# Altium PCB Рожкова.pcbdoc
Units mm, origin at the board's own origin, x right, y up, seen from the top; angles counter-clockwise.
Board outline 45 x 47.5 mm, 2 copper layers (Top Layer, Bottom Layer); 29 components, 20 nets, 108 pads, 19 vias.
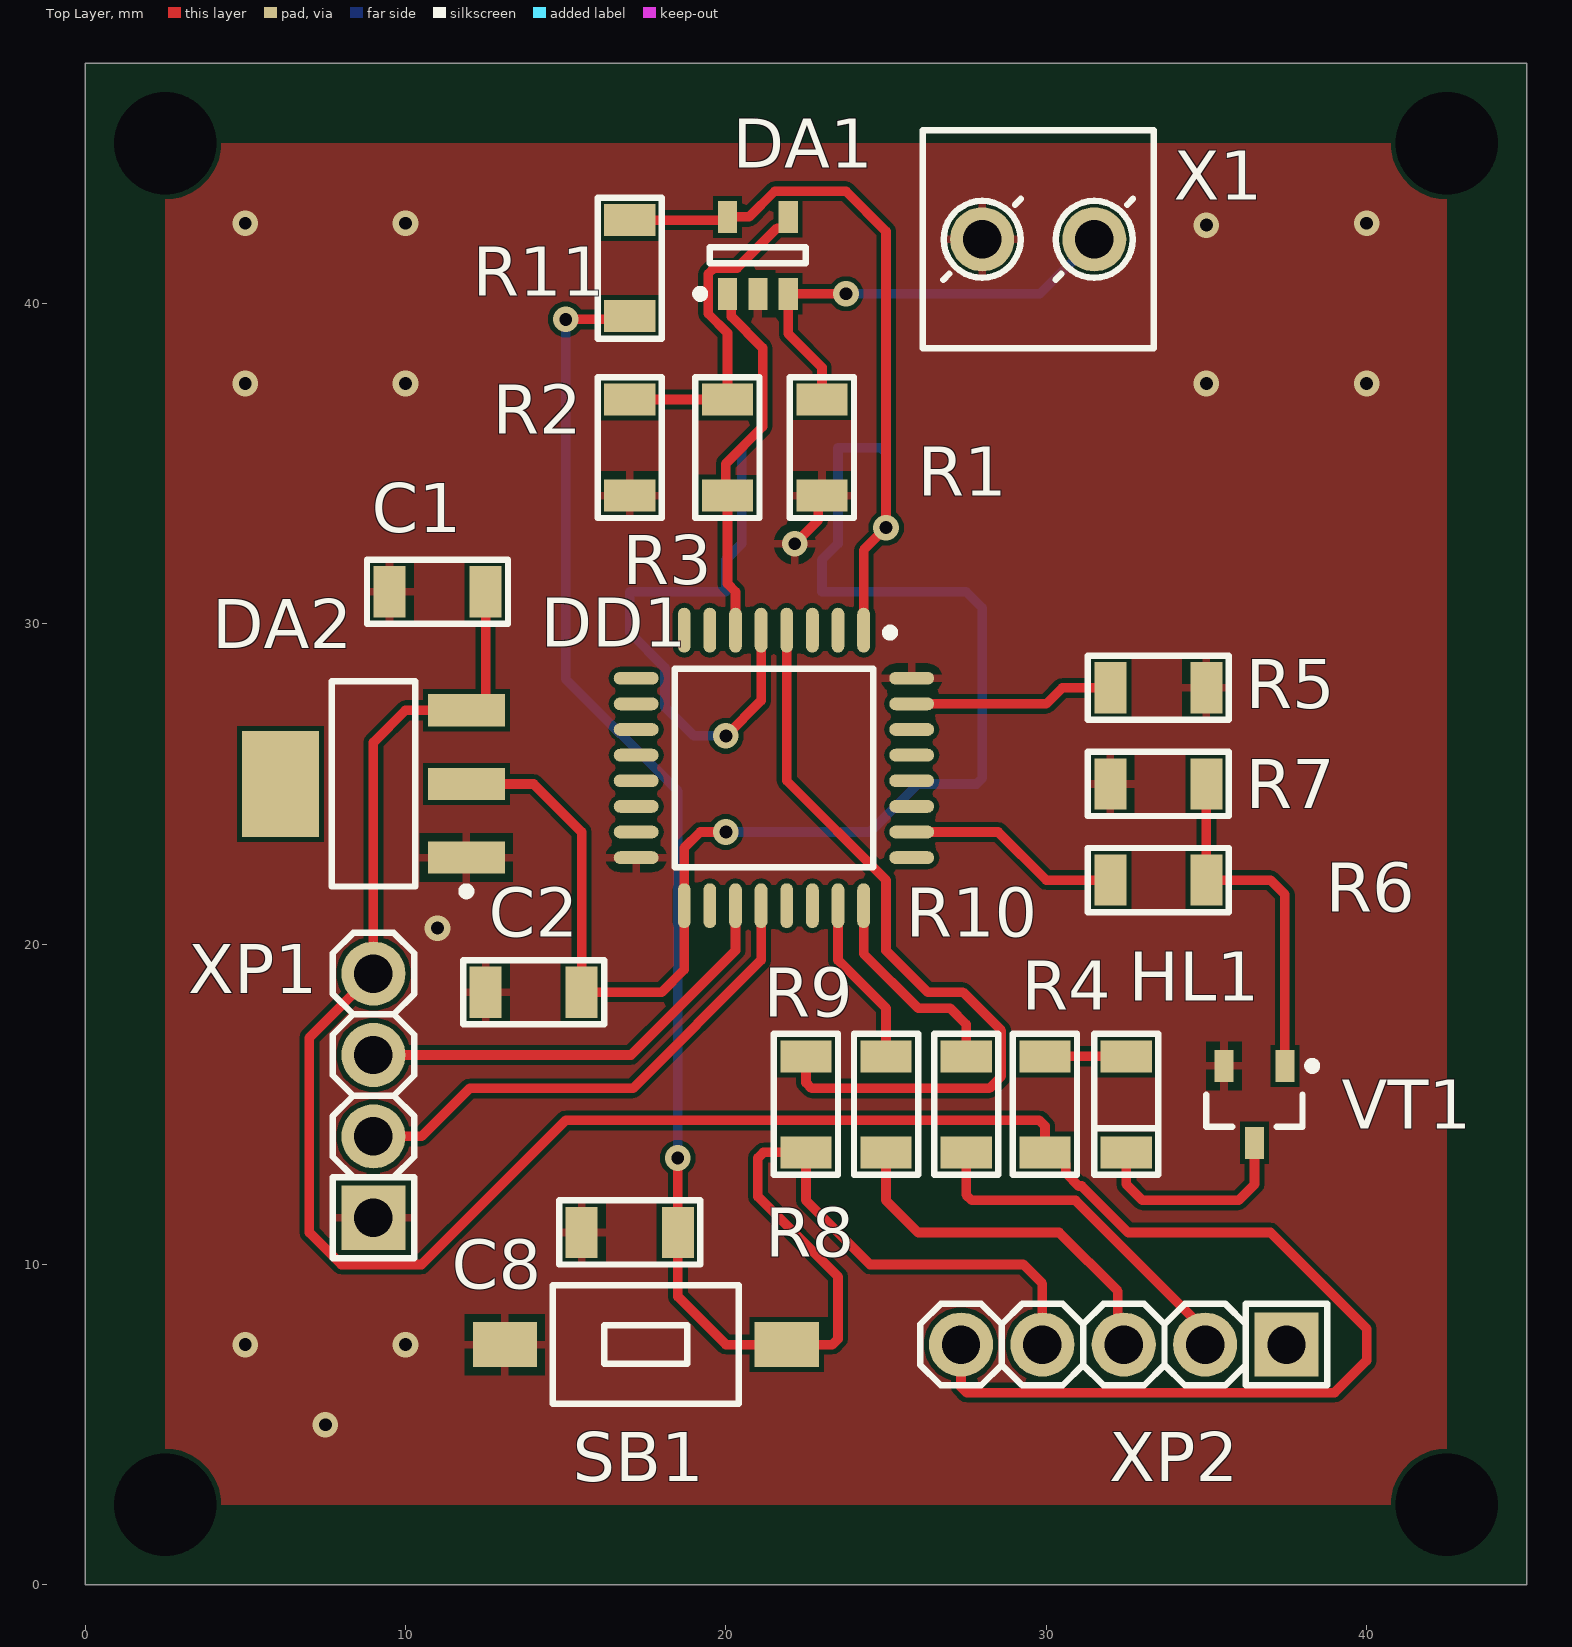
[diagram p0: Top Layer view]
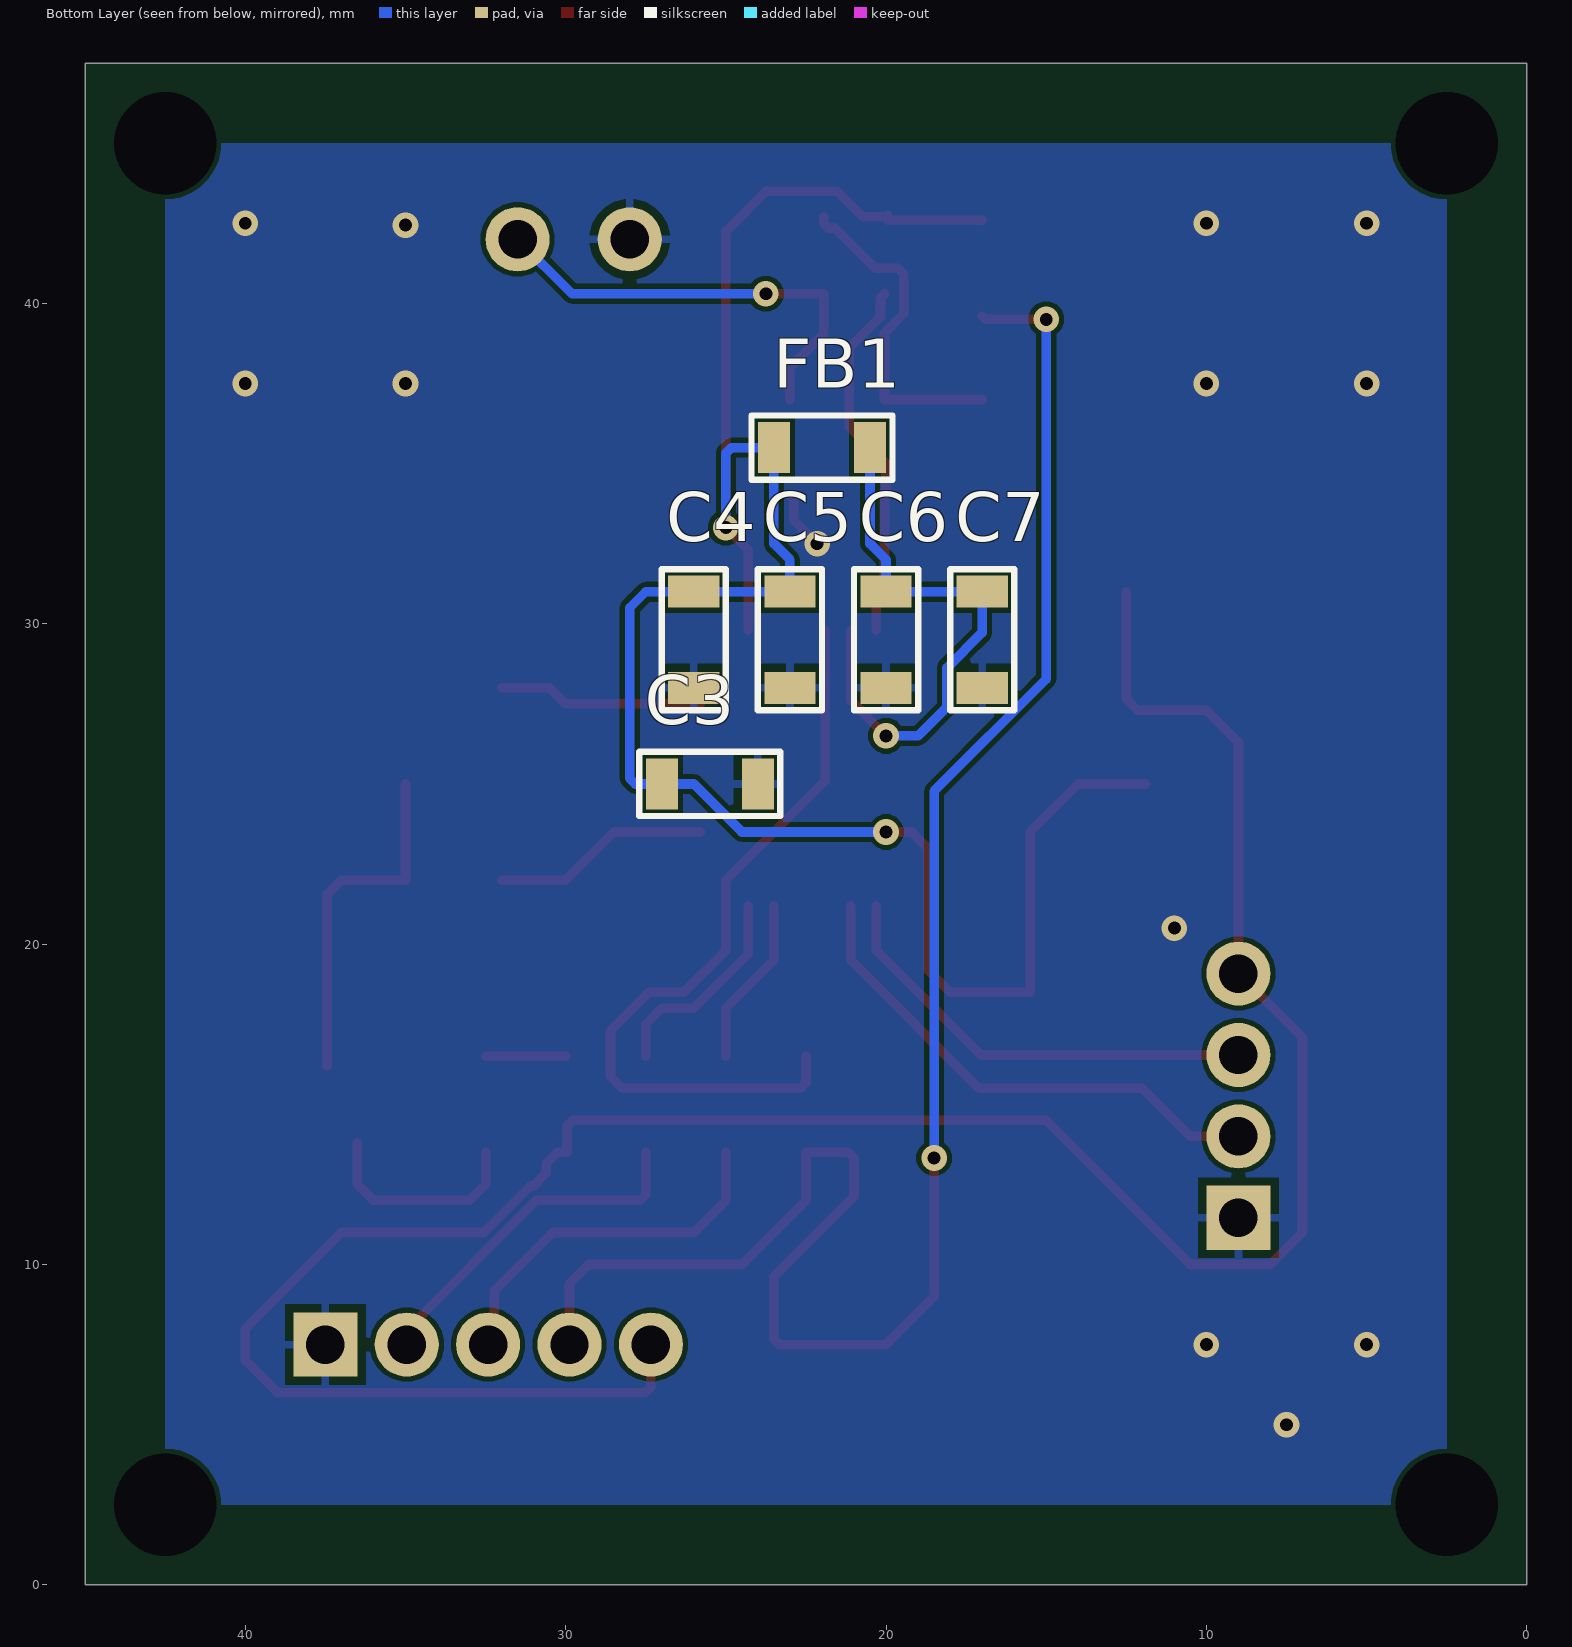
[diagram p1: Bottom Layer view, seen from below]
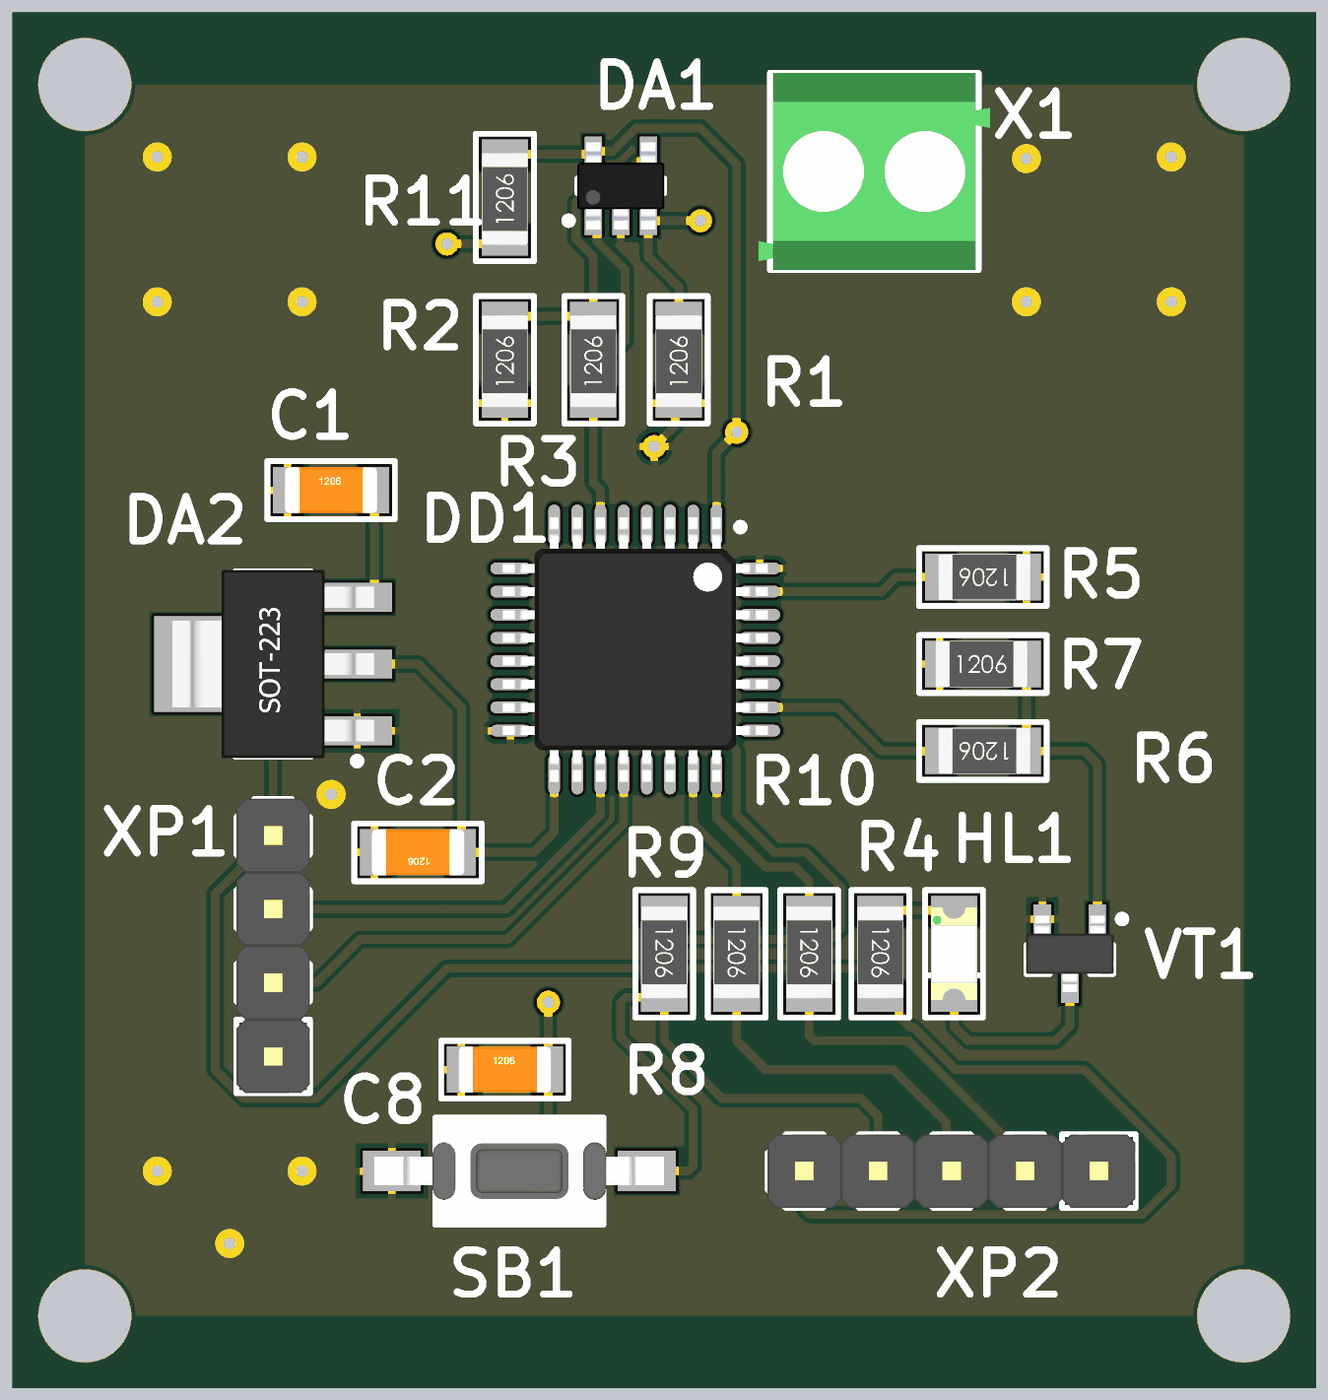
[diagram p2: 3D render of the assembled board from above, using the file's embedded part models]
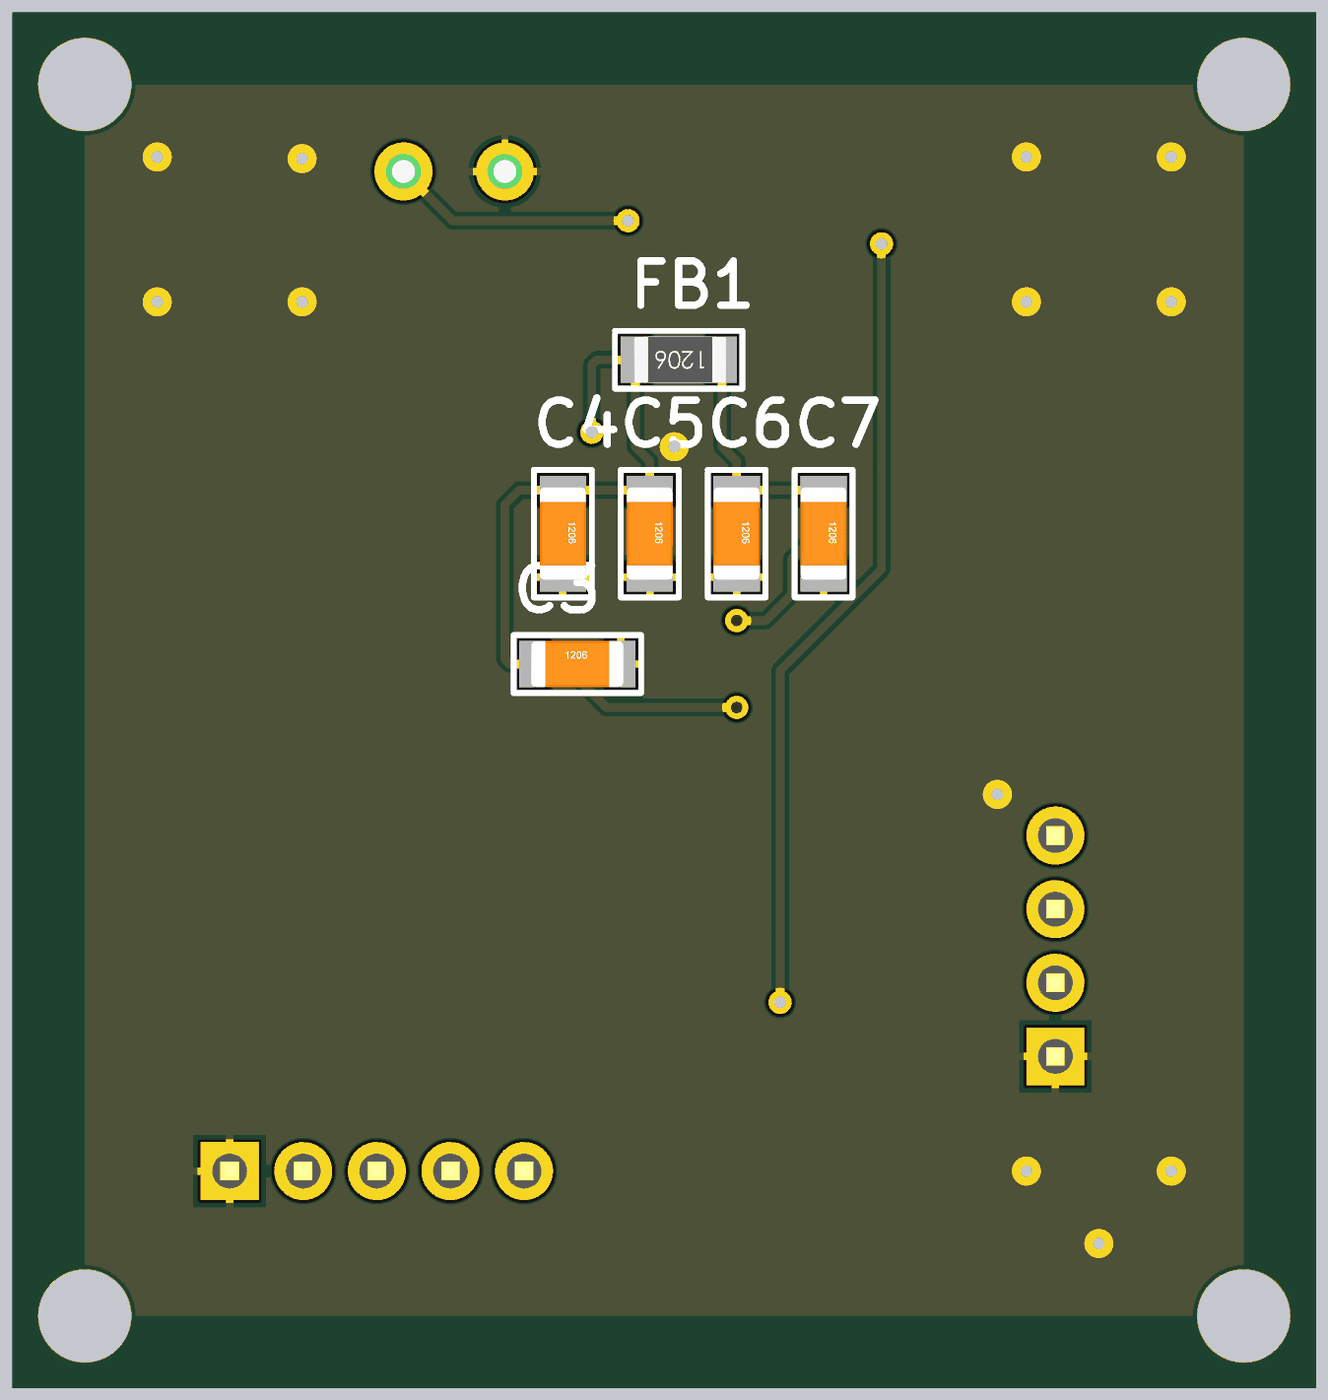
[diagram p3: 3D render of the assembled board from below, using the file's embedded part models]

## Layer stack, top to bottom
Top Solder: solder mask 0.0102, Solder Resist, Dk 3.5
Top Layer: signal copper 0.0356
Dielectric 1: dielectric 0.32, FR-4, Dk 4.8
Bottom Layer: signal copper 0.0356
Bottom Solder: solder mask 0.0102, Solder Resist, Dk 3.5

## Board outline
0,0 45,0 45,47.5 0,47.5

## Design rules (kind name [scope] priority, off if disabled: settings)
Clearance [All] p1: gap=0.15 ignorepadtopadclearanceinfootprint=FALSE except(0: Arc-Hole Track-Hole SMDPad-Hole THPad-Hole Via-Hole Fill-Hole Poly-Hole Region-Hole Text-Hole)
PolygonConnect [All] p1: connectstyle=Relief reliefconductorwidth=0.254 reliefentries=4 polygonreliefangle="90 Angle" airgapwidth=0.254
RoutingVias [All] p1: holewidth=2 width=4 viastyle="Through Hole" minholewidth=0.4 minwidth=0.8 maxholewidth=1 maxwidth=2
SolderMaskExpansion [All] p1: expansion=0.102 istentingtop=FALSE
Width [All] p1: maxlimit=0.3 minlimit=0.3 preferedwidth=0.3
30 further rules are at their usual default settings.

## Components (designator, comment, footprint, x,y, rotation, side; value= is the part's Value field where it differs from the comment)
C1 "Capacitor" "CAP: 1206" 11,31 r0 top
C2 "Capacitor" "CAP: 1206" 14,18.5 r180 top
C3 "Capacitor" "CAP: 1206" 25.5,25 r180 bottom
C4 "Capacitor" "CAP: 1206" 26,29.5 r270 bottom
C5 "Capacitor" "CAP: 1206" 23,29.5 r270 bottom
C6 "Capacitor" "CAP: 1206" 20,29.5 r270 bottom
C7 "Capacitor" "CAP: 1206" 17,29.5 r270 bottom
C8 "Capacitor" "CAP: 1206" 17,11 r0 top
DA1 "MCP6001" SOT23-5 21,41.5 r90 top
DA2 "LD1117AS33TR" SOT223 9,25 r180 top
DD1 "Stm32F030K6T6" 32-LQFP 21.5,25.5 r270 top
FB1 "Chip Beads" "RES: 1206" 22,35.5 r0 bottom
HL1 "Diode" "LED: 1206G" 32.5,15 r270 top
R1 "Resistor" "RES: 1206" 23,35.5 r90 top
R2 "Resistor" "RES: 1206" 17,35.5 r90 top
R3 "Resistor" "RES: 1206" 20.05,35.5 r90 top
R4 "Resistor" "RES: 1206" 29.96,15 r270 top
R5 "Resistor" "RES: 1206" 33.5,25 r0 top
R6 "Resistor" "RES: 1206" 33.5,22 r180 top
R7 "Resistor" "RES: 1206" 33.5,28 r180 top
R8 "Resistor" "RES: 1206" 22.5,15 r270 top
R9 "Resistor" "RES: 1206" 25,15 r270 top
R10 "Resistor" "RES: 1206" 27.5,15 r270 top
R11 "Resistor" "RES: 1206" 17,41.1 r90 top
SB1 "FSMSM" TM1101R50B 17.5,7.5 r180 top
VT1 "BC847_NPN" SOT23 36.5,15 r270 top
X1 "DG350-3.5" CON:DG350 29.75,42 r180 top
XP1 "DS-1021-1x4" "CON: PLS-4" 9,15.27 r90 top
XP2 "DS-1021-1X5" "CON: PLS-5" 32.42,7.5 r180 top

## Footprints (in the part's own frame and the unit in brackets; to place one, negate y for a bottom-side part, rotate by r counter-clockwise, add the part's x,y. Pads: shape width x height; smd on the part's side, far side on the other; paste and mask are expansions set on the pad)
32-LQFP [mm] "pitch 0.8 mm"
  rrect100% 1.4x0.4 smd: 1(-4.3,2.8) 2(-4.3,2) 3(-4.3,1.2) 4(-4.3,0.4) 5(-4.3,-0.4) 6(-4.3,-1.2) 7(-4.3,-2) 8(-4.3,-2.8) 17(4.3,-2.8) 18(4.3,-2) 19(4.3,-1.2) 20(4.3,-0.4) 21(4.3,0.4) 22(4.3,1.2) 23(4.3,2) 24(4.3,2.8)
  rrect100% 0.4x1.4 smd: 9(-2.8,-4.3) 10(-2,-4.3) 11(-1.2,-4.3) 12(-0.4,-4.3) 13(0.4,-4.3) 14(1.2,-4.3) 15(2,-4.3) 16(2.8,-4.3) 25(2.8,4.3) 26(2,4.3) 27(1.2,4.3) 28(0.4,4.3) 29(-0.4,4.3) 30(-1.2,4.3) 31(-2,4.3) 32(-2.8,4.3)
  round 0.5 on Mech1: ""(-4,4)
  silkscreen extent -4.35,-3.1 3.1,3.75, body extent -4.57,-4.57 4.57,4.57, height 1.62
"CAP: 1206" [mm]
  rect 1x1.6 smd: 1(-1.5,0) 2(1.5,0)
  silkscreen extent -2.2,-1 2.2,1, body extent -1.6,-0.8 1.6,0.8, height 1
"CON: PLS-4" [mm] "PLS-40 4 pin header"
  round 2 hole 1.2: 1(3.81,0) 2(1.27,0) 3(-1.27,0)
  rect 2x2 hole 1.2: 4(-3.81,0)
  silkscreen extent -5.08,-1.27 5.08,1.27, body extent -5.08,-1.27 5.08,1.27, height 8.54
"CON: PLS-5" [mm]
  round 2 hole 1.2: 1(5.08,0) 2(2.54,0) 3(0,0) 4(-2.54,0)
  rect 2x2 hole 1.2: 5(-5.08,0)
  silkscreen extent -6.35,-1.27 6.35,1.27, body extent -6.35,-1.27 6.35,1.27, height 8.54
CON:DG350 [mm]
  round 2 hole 1.2: 1(-1.75,0) 2(1.75,0)
  round 0.5 on Top Overlay: ""(-3.1,-2.9)
  silkscreen extent -3.6,-3.4 3.6,3.4, body extent -4,-3.4 4,3.4, height 8.4
"LED: 1206G" [mm]
  rect 1x1.6 smd: 1(-1.5,0) 2(1.5,0)
  silkscreen extent -2.2,-1 2.2,1, body extent -1.6,-0.8 1.6,0.8, height 1.1
"RES: 1206" [mm]
  rect 1x1.6 smd: 1(-1.5,0) 2(1.5,0)
  silkscreen extent -2.2,-1 2.2,1, body extent -1.65,-0.8 1.55,0.8, height 0.47
SOT23 [mm]
  rect 1x0.6 smd: 1(-1.2,0.95) 2(-1.2,-0.95) 3(1.2,0)
  round 0.5 on Mech1: ""(-0.9,1.1)
  silkscreen extent -1.32,-1.5 0.7,1.92, body extent -1.32,-1.52 1.32,1.52, height 1.12
SOT23-5 [mm] "pitch 0.95 mm"
  rect 1x0.6 smd: 1(-1.2,0.95) 2(-1.2,0) 3(-1.2,-0.95) 4(1.2,-0.95) 5(1.2,0.95)
  round 0.5 on Mech1: ""(-1.1,1.1)
  silkscreen extent -1.32,-1.5 0.25,1.92, body extent -1.5,-1.5 1.5,1.5, height 1.3
SOT223 [mm] "SOT223, 4-Leads, Body 6,50x7,00mm (avg), Pitch 2,30mm, IPC Medium Density"
  rect 2.4x1 smd: 1(-2.9,2.3) 2(-2.9,0) 3(-2.9,-2.3)
  rect 2.4x3.3 smd: 4(2.9,0)
  round 0.5 on Mech1: ""(-3,2.7)
  silkscreen extent -3.03,-3.2 1.3,3.47, body extent -3.48,-3.25 3.48,3.25, height 1.65
TM1101R50B [mm] "Body 3.7x6.1mm, Pushbutton Switch,  SUN RISE TM Series"
  rect 2x1.4 smd: 1(-4.4,0) 2(4.4,0)
  silkscreen extent -2.9,-1.85 2.9,1.85, body extent -5,-1.75 5,1.75, height 4.3

## Part data
C1 C2 C3 C4 C5 C6 C7 C8: Published=18.05.2010, Publisher="Andrew Danich", Type=Конденсатор
HL1: Published=18.05.2010, Publisher="Andrew Danich", Type=Диод
R1 R2 R3 R4 R5 R6 R7 R8 R9 R10 R11: Published=24.03.2010, Publisher="Andrew Danich", Type=Резистор
VT1: Published=07.05.2013, Publisher="Andrew Danich", Type=Транзистор

## Free pads (board coordinates)
  round 1.524 hole 3.2: 9(2.5,45) 11(42.5,45) 12(42.5,2.5) 13(2.5,2.5)

## Via types
v1: diameter 0.8, hole 0.4, Top Layer to Bottom Layer, 19 vias

## Nets (pads, with @x,y where several pads share a name; then routed paths per layer and width w, separated by ;. In a path a pad name is that pad's centre, name@x,y a point inside that pad or via, vN(x,y) a via of type N, cw(c..) or ccw(c..) an arc to the next point about the centre after c; other vN are vias at no path point)
+5В: C1.2 DA2.3 R4.2 XP1.1 XP2.1 | length 77.6
  Top Layer w0.3: C1.2 12.5,27.65 12.15,27.3 10,27.3 9,26.3 XP1.1 7,17.08 7,11 8,10 10.5,10 12.5,12 15,14.5 29.784,14.5 29.96,14.324 R4.2 30.26,13.5 30.61,13.15 30.61,12.85 31.01,12.45 31.106,12.45 32.556,11 37,11 40,8 40,7 39,6 27.516,6 27.34,6.176 XP2.1
GND: C1.1 C2.2 C3.2 C4.2 C5.2 C6.2 C7.2 C8.1 DA1.2 DA2.1 DD1.16 DD1.32 R1.1 R2.1 R5.1 R7.1 SB1.2 VT1.2 X1.2 XP1.4 XP2.5 | length 1.9
  Top Layer w0.3: v1(22.152,32.5) 22.878,33.226 22.878,33.878 R1.1
  other v1: 7.5,5 5,7.5 10,7.5 11,20.5 5,37.5 10,37.5 35,37.5 40,37.5 35,42.444 5,42.5 10,42.5 40,42.5
NetC2_1: C2.1 C3.1 C4.1 C5.1 DA1.5 DA2.2 DD1.1 DD1.17 FB1.2 R11.2 | length 67.5
  Top Layer w0.3: DA2.2 14,25 15.5,23.5 C2.1 18,18.5 18.7,19.2 DD1.17 18.7,23 19.2,23.5 v1(20,23.5) ; R11.2 19.95,42.6 DA1.5@19.95,42.75 ; DA1.5 20.726,42.7 21.526,43.5 23.75,43.5 25,42.25 v1(25,33) 24.3,32.3 DD1.1
  Bottom Layer w0.3: v1(20,23.5) 24.5,23.5 26,25 27.824,25 28,25.176 28,30.5 27.5,31 C4.1 C5.1 23,32 23.5,32.5 FB1.2 24.824,35.5 25,35.324 v1(25,33)
NetC6_1: C6.1 C7.1 DD1.5 FB1.1 | length 17.8
  Top Layer w0.3: v1(20,26.5) 21.1,27.6 DD1.5
  Bottom Layer w0.3: v1(20,26.5) 19,26.5 18.1,27.4 18.1,28.624 17,29.724 C7.1 C6.1 20,32 20.5,32.5 FB1.1
NetC8_2: C8.2 R8.2 R11.1 SB1.1 XP2.2 | length 59.8
  Top Layer w0.3: v1(15,39.5) 16.9,39.5 R11.1 ; v1(18.5,13.324) C8.2 18.5,9 20,7.5 23.324,7.5 23.5,7.676 23.5,9.623 21,12.123 21,13.324 21.176,13.5 R8.2 22.5,12 24.5,10 29.284,10 29.88,9.404 XP2.2
  Bottom Layer w0.3: v1(15,39.5) 15,28.276 18.5,24.776 v1(18.5,13.324)
NetDA1_1: DA1.1 DD1.6 R3.1 | length 11.6
  Top Layer w0.3: DA1.1 20.174,40.176 20.174,39.588 21.15,38.612 21.15,36.15 20,35 20,34.05 R3.1 20.05,31.25 20.3,31 DD1.6
NetDA1_3: DA1.3 R1.2 X1.1 | length 14
  Top Layer w0.3: R1.2 23,38 21.95,39.05 DA1.3 v1(23.75,40.3)
  Bottom Layer w0.3: v1(23.75,40.3) 29.8,40.3 X1.1
NetDA1_4: DA1.4 R2.2 R3.2 | length 10.6
  Top Layer w0.3: R2.2 R3.2 20.05,39.076 19.45,39.676 19.45,40.924 19.626,41.1 20.35,41.1 21.6,42.35 21.8,42.35 21.95,42.5 DA1.4
NetDD1_4: DD1.4 R8.1 | length 24.5
  Top Layer w0.3: DD1.4 21.9,25.1 25,22 25,19.8 26.3,18.5 27.4,18.5 28.6,17.3 28.6,15.876 28.224,15.5 22.676,15.5 22.5,15.676 R8.1
NetDD1_19: DD1.19 XP1.2 | length 14.1
  Top Layer w0.3: XP1.2 17.04,16.54 20.3,19.8 DD1.19
NetDD1_20: DD1.20 XP1.3 | length 16.1
  Top Layer w0.3: XP1.3 10.5,14 12,15.5 17.1,15.5 21.1,19.5 DD1.20
NetDD1_23: DD1.23 R9.1 | length 5.3
  Top Layer w0.3: DD1.23 23.5,19.5 25,18 R9.1
NetDD1_24: DD1.24 R10.1 | length 6.6
  Top Layer w0.3: DD1.24 24.3,19.7 26,18 27,18 27.5,17.5 R10.1
NetDD1_26: DD1.26 R6.2 | length 6.8
  Top Layer w0.3: DD1.26 28.5,23.5 30,22 R6.2
NetDD1_31: DD1.31 R7.2 | length 6.4
  Top Layer w0.3: DD1.31 30,27.5 30.5,28 R7.2
NetHL1_1: HL1.1 R4.1 | length 2.5
  Top Layer w0.3: R4.1@30,16.5 HL1.1
NetHL1_2: HL1.2 VT1.3 | length 6.7
  Top Layer w0.3: HL1.2 32.5,12.5 33,12 36,12 36.5,12.5 VT1.3
NetR5_2: R5.2 R6.1 VT1.1 | length 11
  Top Layer w0.3: R5.2 R6.1 37,22 37.45,21.55 VT1.1
NetR9_2: R9.2 XP2.3 | length 11.7
  Top Layer w0.3: R9.2 25,12 26,11 30.404,11 32.235,9.169 32.235,7.685 XP2.3
NetR10_2: R10.2 XP2.4 | length 11
  Top Layer w0.3: R10.2 27.5,12.176 27.676,12 30.92,12 34.96,7.96 XP2.4
pads on no net: DA1. DA2. DA2.4 DD1. DD1.2 DD1.3 DD1.7 DD1.8 DD1.9 DD1.10 DD1.11 DD1.12 DD1.13 DD1.14 DD1.15 DD1.18 DD1.21 DD1.22 DD1.25 DD1.27 DD1.28 DD1.29 DD1.30 VT1. X1.

## Polygon pours and split planes (outlines as drawn)
GND on Top Layer "GND_L01_P000" (solid, pour order 0): 2.5,45 42.5,45 42.5,2.5 2.5,2.5
GND on Bottom Layer "GND_L02_P001" (solid, pour order 1): 2.5,45 42.5,45 42.5,2.5 2.5,2.5

## Silkscreen, mask and mechanical layers (free items; w line width, h text height)
Mechanical 1:
  lines w0.254: 0,0 0,47.5 45,47.5 45,0 43.75,0 41.25,0 32.5,0 7.5,0 0,0 ; 135,73.75 135,73.75